# Altium PCB A1.PcbDoc (part 1 of 3)
Units mil, origin at the board's own origin, x right, y up, seen from the top; angles counter-clockwise.
Board outline 3937.01 x 3149.61 mil, 2 copper layers (Top Layer, Bottom Layer); 91 components, 93 nets, 317 pads, 42 vias.
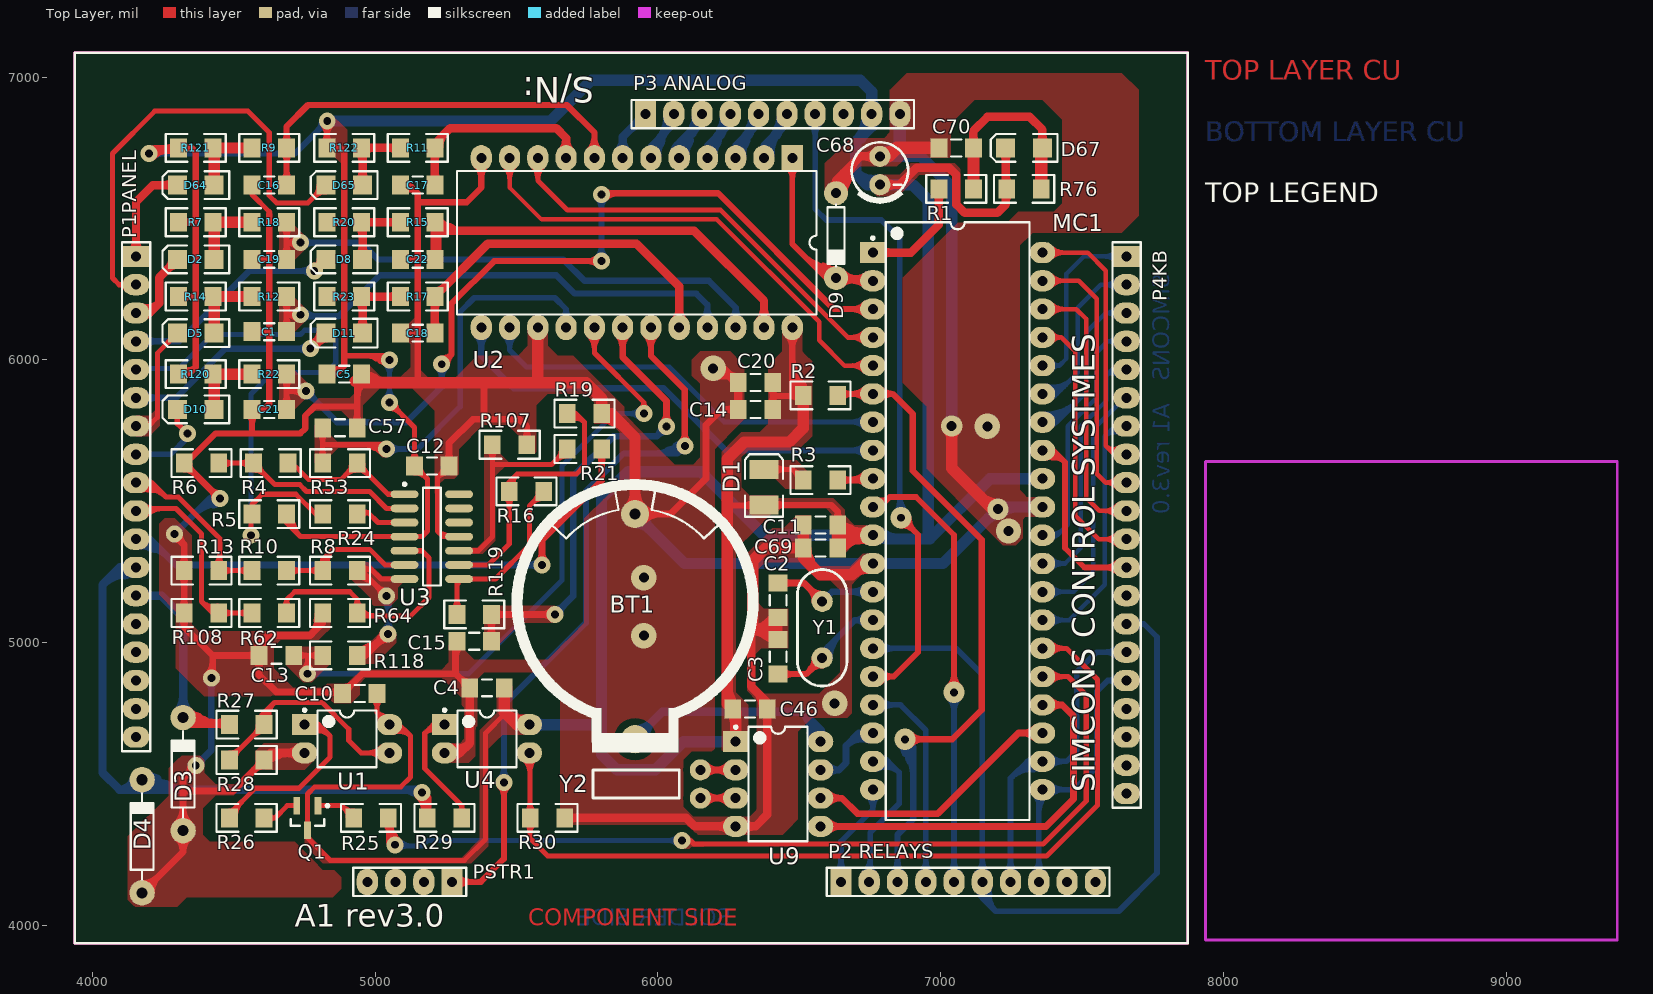
[diagram p0: Top Layer view]
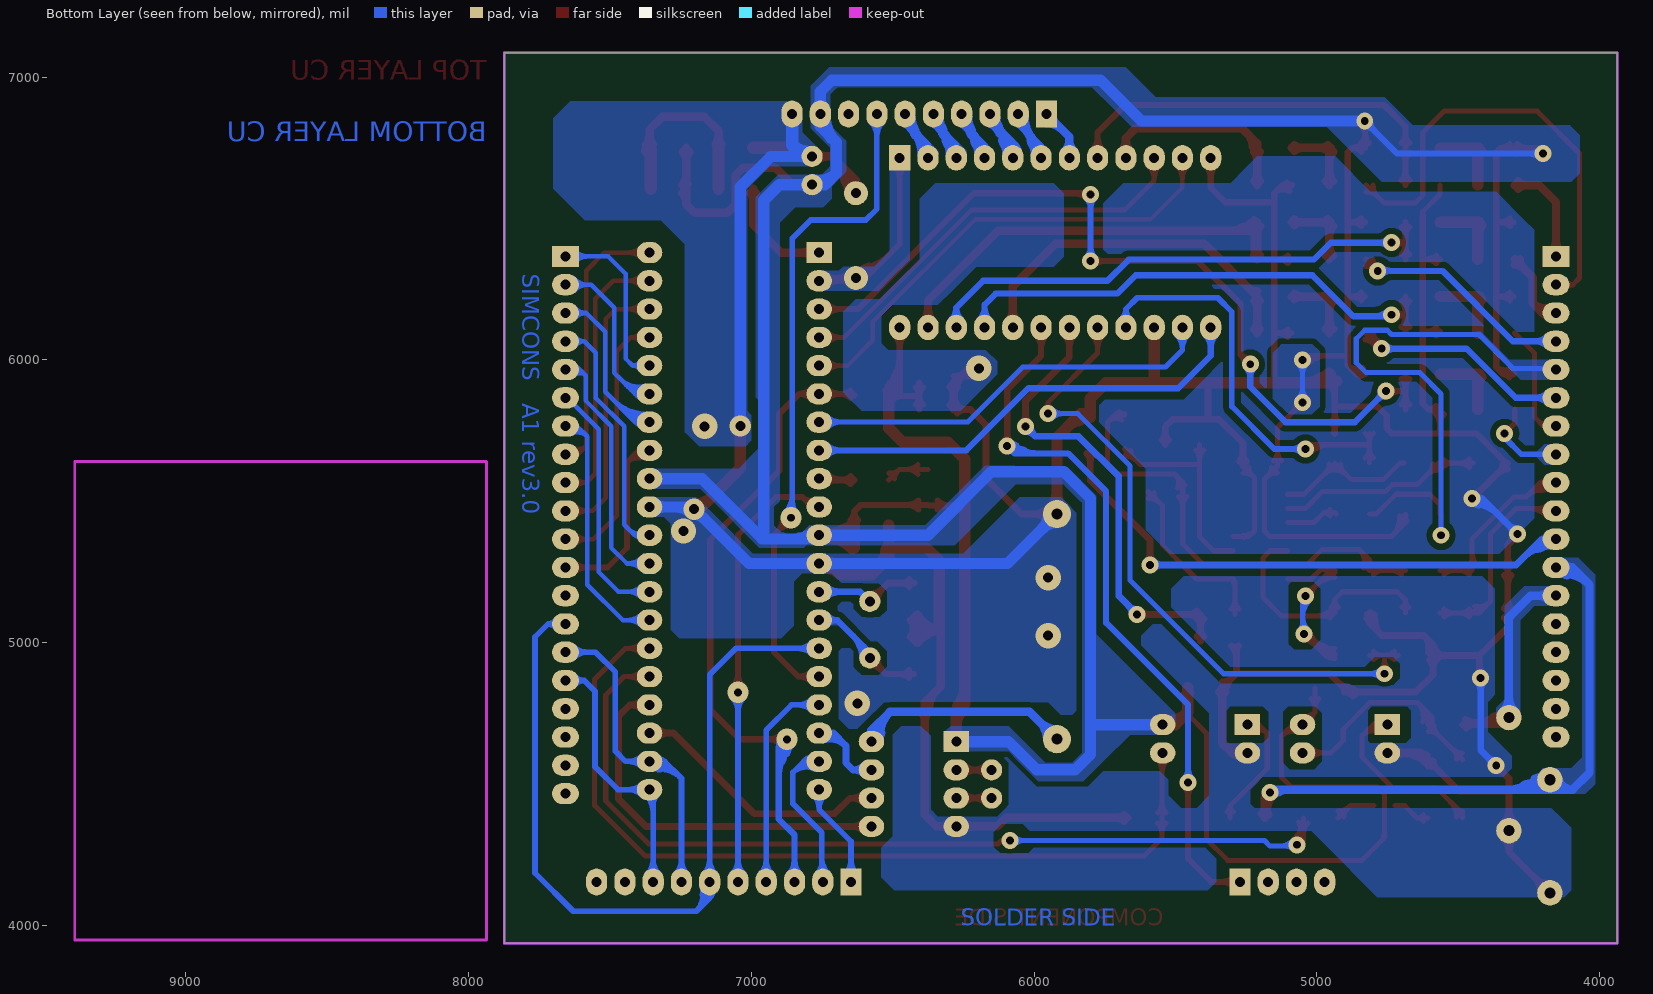
[diagram p1: Bottom Layer view, seen from below]
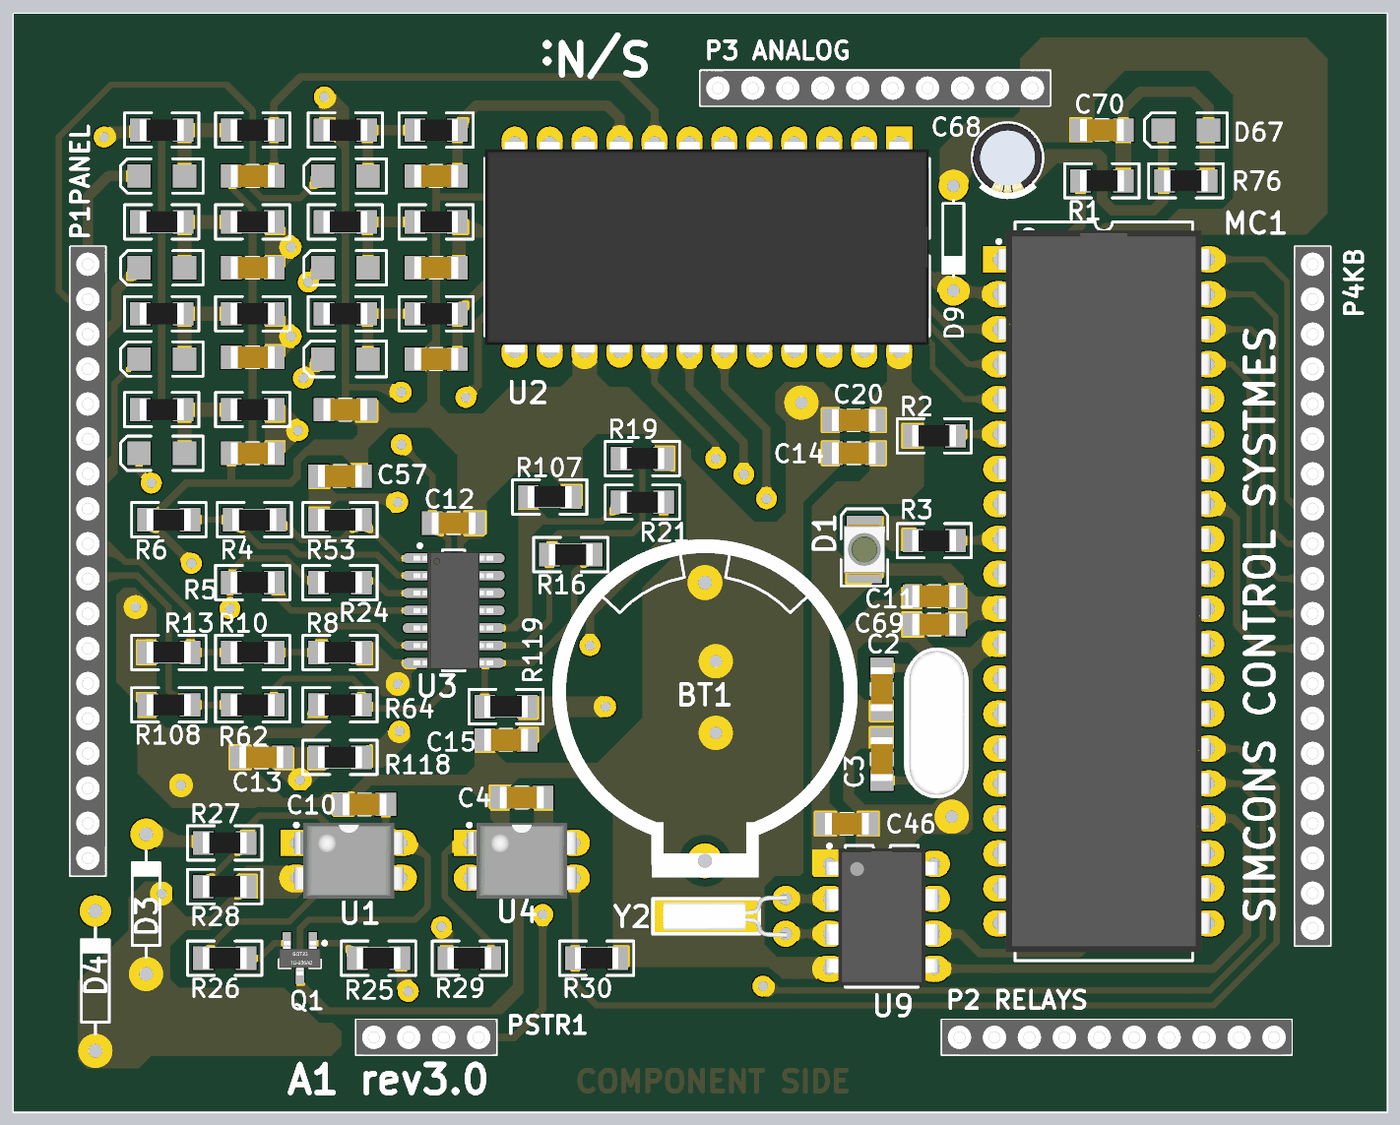
[diagram p4: 3D render of the assembled board from above, using the file's embedded part models]

## Layer stack, top to bottom
Top Layer: signal copper 1.4
Dielectric: dielectric 12.6, FR-4, Dk 4.8
Bottom Layer: signal copper 1.4

## Board outline
3937.01,3937.01 7874.02,3937.01 7874.02,7086.61 3937.01,7086.61

## Design rules (kind name [scope] priority, off if disabled: settings)
Clearance [All] p1: gap=16
Height [All] p1: minheight=0 maxheight=10000 prefheight=500
MinimumSolderMaskSliver [All] p1 off: minsoldermaskwidth=10
PlaneClearance [All] p1: clearance=22
PlaneConnect [All] p1: planeconnectstyle=Direct reliefexpansion=20 reliefentries=4 reliefconductorwidth=10 reliefairgap=10
PolygonConnect [All] p1: connectstyle=Direct reliefconductorwidth=10 reliefentries=4 polygonreliefangle="90 Angle"
RoutingVias [All] p1: holewidth=28 width=75 viastyle="Through Hole" minholewidth=28 minwidth=60 maxholewidth=28 maxwidth=100
SilkToSilkClearance [All] p1 off: silktosilkclearance=10
SilkscreenOverComponentPads [All] p1 off: minsilkscreentomaskgap=10
SolderMaskExpansion [All] p1: expansion=4
Width [All] p1: maxlimit=60 minlimit=16 preferedwidth=22
22 further rules are at their usual default settings.

## Components (designator, comment, footprint, x,y, rotation, side; value= is the part's Value field where it differs from the comment)
BT1 "Battery" CELL_HOLDER 5919,5142 r270 top
C1 "Cap Ceramic .1uF" C1206_W 4625,6100 r0 top
C2 "Cap Ceramic 22pF" C1206_W 6425,5150 r90 top
C3 "Cap Ceramic 22pF" C1206_W 6425,4950 r270 top
C4 "Cap Ceramic .1uF" C1206_W 5395,4840 r0 top
C5 "Cap Ceramic .1uF" C1206_W 4890,5950 r180 top
C10 "Cap Ceramic .1uF" C1206_W 4945,4820 r0 top
C11 "Cap Ceramic .1uF" C1206_W 6575,5416 r0 top
C12 "Cap Ceramic .1uF" C1206_W 5200,5625 r180 top
C13 "Cap2" C1206_W 4650,4955 r180 top
C14 "Cap Ceramic .1uF" C1206_W 6345,5825 r0 top
C15 "Cap2" C1206_W 5350,5005 r180 top
C16 "Cap Ceramic .1uF" C1206_W 4625,6618.61 r0 top
C17 "Cap Ceramic .1uF" C1206_W 5150,6618.61 r0 top
C18 "Cap Ceramic .1uF" C1206_W 5150,6095 r0 top
C19 "Cap Ceramic .1uF" C1206_W 4625,6355.82 r0 top
C20 "Cap" C1206_W 6345,5920 r0 top
C21 "Cap Ceramic .1uF" C1206_W 4625,5825 r0 top
C22 "Cap Ceramic .1uF" C1206_W 5150,6355.82 r0 top
C46 "Cap Ceramic .1uF" C1206_W 6325,4765 r180 top
C57 "Cap2" C1206_W 4875,5760 r0 top
C68 "Cap Ceramic .1uF" CAP_.1 6785,6670 r0 top
C69 "Cap Ceramic .1uF" C1206_W 6575,5335 r0 top
C70 "Cap2" C1206_W 7055,6750 r180 top
D1 "LED1" "LED SMD" 6375,5550 r90 top
D2 "Diode 1N4001" 4148SMDW 4365,6355.82 r0 top
D3 "P6KE6V8A" DIODE1A 4320,4535 r90 top
D4 "P6KE6V8A" DIODE1A 4175,4315 r90 top
D5 "Diode 1N4001" 4148SMDW 4365,6095 r0 top
D8 "Diode 1N4001" 4148SMDW 4890,6355.82 r0 top
D9 "Diode 1N4001" "DZENOR .25W" 6630,6440 r270 top
D10 "Diode 1N4001" 4148SMDW 4365,5825 r0 top
D11 "Diode 1N4001" 4148SMDW 4890,6095 r0 top
D64 "Diode 1N4001" 4148SMDW 4365,6618.61 r0 top
D65 "Diode 1N4001" 4148SMDW 4890,6618.61 r0 top
D67 "Diode 1N4001" 4148SMDW 7295,6750 r0 top
MC1 "PIC18F4620-I/P" PDIP600-P40 7060,5430 r0 top
P1PANEL "Header 18" HDR1X18_BURGE_F 4153.54,6366.14 r270 top locked
"P2 RELAYS" "Header 10" HDR1X10_BURGE_F 6647.24,4153.54 r0 top locked
"P3 ANALOG" "Header 10" HDR1X10_BURGE_F 5955.91,6870.08 r0 top locked
P4KB "Header 20" HDR1X20_BURGE_F 7657.48,6366.14 r270 top locked
PSTR1 "Header 4" HDR1X4_BURGE_F 5271.65,4153.54 r180 top locked
Q1 "BC847" SOT23_M 4760,4380 r270 top
R1 "Res 20K" R1206_W 7055,6605 r0 top
R2 "Res 1K" R1206_W 6575,5875 r180 top
R3 "Res 1K" R1206_W 6575,5575 r0 top
R4 "Res1" R1206_W 4630,5635 r180 top
R5 "Res 1K" R1206_W 4625,5455 r180 top
R6 "Res1" R1206_W 4385,5635 r180 top
R7 "Res 1K" R1206_W 4365,6487.21 r0 top
R8 "Res 1K" R1206_W 4875,5255 r0 top
R9 "Res 1K" R1206_W 4625,6750 r0 top
R10 "Res 1K" R1206_W 4625,5255 r0 top
R11 "Res 1K" R1206_W 5150,6750 r0 top
R12 "Res1" R1206_W 4625,6224.43 r0 top
R13 "Res 1K" R1206_W 4385,5255 r0 top
R14 "Res 1K" R1206_W 4365,6224.43 r0 top
R15 "Res1" R1206_W 5150,6487.21 r0 top
R16 "Res 1K" R1206_W 5535,5535 r0 top
R17 "Res 1K" R1206_W 5150,6224.43 r0 top
R18 "Res1" R1206_W 4625,6487.21 r0 top
R19 "Res 1K" R1206_W 5740,5810 r180 top
R20 "Res 1K" R1206_W 4890,6487.21 r0 top
R21 "Res 1K" R1206_W 5740,5685 r0 top
R22 "Res 1K" R1206_W 4625,5950 r0 top
R23 "Res 1K" R1206_W 4890,6224.43 r0 top
R24 "Res 1K" R1206_W 4875,5455 r0 top
R25 "2.2K" R1206_W 4985,4380 r180 top
R26 "220E" R1206_W 4545,4380 r180 top
R27 "MFR 1K .25W" R1206_W 4545,4710 r180 top
R28 "MFR 10K .25W" R1206_W 4545,4585 r180 top
R29 "MFR 1K .25W" R1206_W 5245,4380 r0 top
R30 "MFR 1K .25W" R1206_W 5608.98,4380 r0 top
R53 "Res1" R1206_W 4875,5635 r0 top
R62 "Res 1K" R1206_W 4625,5105 r0 top
R64 "Res 1K" R1206_W 4875,5105 r0 top
R76 "Res 20K" R1206_W 7295,6605 r0 top
R107 "Res 1K" R1206_W 5475,5700 r0 top
R108 "Res 1K" R1206_W 4385,5105 r0 top
R118 "Res Semi" R1206_W 4875,4955 r180 top
R119 "Res Semi" R1206_W 5350,5100 r0 top
R120 "Res Semi" R1206_W 4365,5950 r180 top
R121 "Res Semi" R1206_W 4365,6750 r180 top
R122 "Res Semi" R1206_W 4890,6750 r180 top
U1 "PC817" DIP-4 4900,4660 r0 top
U2 "HCF4067BM1" CDIP24 5925,6415 r180 top
U3 "LM324D" SOIC14_M 5200,5375 r0 top
U4 "PC817" DIP-4 5395,4660 r0 top
U9 "DS1302" DIP-8 6425,4500 r0 top
Y1 "XTAL" XTAL 6581,5046 r90 top
Y2 "XTAL" XTALWATCH 6150,4500 r90 top

## Footprints (in the part's own frame and the unit in brackets; to place one, negate y for a bottom-side part, rotate by r counter-clockwise, add the part's x,y. Pads: shape width x height; smd on the part's side, far side on the other; paste and mask are expansions set on the pad)
4148SMDW [mm] "Diode 250mA"
  rect 1.7x1.7 smd: 1(1.65,0) 2(-1.65,0)
  silkscreen extent -3,-1.25 3,1.25, body extent -1.78,-0.76 1.91,0.76, height 1.52
C1206_W [mm] "Chip Capacitor, Body 3.2x1.6mm, IPC High Density"
  rect 1.5x1.7 smd: 1(-1.55,0) 2(1.55,0)
  silkscreen extent -0.44,-0.76 0.44,0.76, body extent -1.6,-0.8 1.6,0.8, height 1
CAP_.1 [mm]
  round 1.905 hole 0.9: 1(0,1.27) 2(0,-1.27)
  silkscreen extent -2.54,-2.79 2.54,2.54, body extent -2.54,-2.54 2.54,2.54, height 12.7
CDIP24 [mil] "DIP; 24 Leads; Row Spacing 15.24 mm; Pitch 2.54 mm"
  rect 75x90 hole 35.43: 1(-550,-300)
  oval 75x90 hole 35.43: 2(-450,-300) 3(-350,-300) 4(-250,-300) 5(-150,-300) 6(-50,-300) 7(50,-300) 8(150,-300) 9(250,-300) 10(350,-300) 11(450,-300) 12(550,-300) 13(550,300) 14(450,300) 15(350,300) 16(250,300) 17(150,300) 18(50,300) 19(-50,300) 20(-150,300) 21(-250,300) 22(-350,300) 23(-450,300) 24(-550,300)
  silkscreen extent -636,-254 636,254, body extent -635,-304 635,304, height 200
CELL_HOLDER [mm] "Lithium Battery Holder for CR2032 3V Cell"
  round 2.54 hole 1: 1(12.275,0)
  round 2.54 hole 1 mask+0: 2(-7.95,0)
  silkscreen extent -10.6,-10.6 13.47,10.6, body extent -10.62,-10.59 13.17,10.63, height 10
DIODE1A [mil] "DIODE 1 AMPERE"
  round 90 hole 39.37: 1(-200,0) 2(200,0)
  silkscreen extent -152,-40 152,40, body extent -216,-39 216,39, height 82
DIP-4 [mil] "DIP; 4 Leads; Row Spacing 7.62 mm; Pitch 2.54 mm"
  rect 90x75 hole 35.43: 1(-150,50)
  oval 90x75 hole 35.43: 2(-150,-50) 3(150,-50) 4(150,50)
  silkscreen extent -155,-100 104,106, body extent -157,-110 157,108, height 170
DIP-8 [mil] "DIP; 8 Leads; Row Spacing 7.62 mm; Pitch 2.54 mm"
  rect 90x75 hole 35.43: 1(-150,150)
  oval 90x75 hole 35.43: 2(-150,50) 3(-150,-50) 4(-150,-150) 5(150,-150) 6(150,-50) 7(150,50) 8(150,150)
  silkscreen extent -155,-203 104,206, body extent -163,-199 163,194, height 201
"DZENOR .25W" [mil] "Axial Device, Thru-Hole; 2 Leads; 0.3 in Pin Spacing"
  round 85 hole 35.43: 1(-150,0) 2(150,0)
  silkscreen extent -109,-30 109,30, body extent -164,-35 163,35, height 74
HDR1X4_BURGE_F [mil] "Connector; Header; 4 Position"
  rect 75x95 hole 35.43: 1(0,0)
  oval 75x95 hole 35.43: 2(100,0) 3(200,0) 4(300,0)
  silkscreen extent -50,-50 350,50, body extent -50,-50 350,50, height 237
HDR1X10_BURGE_F [mil] "Connector; Header; 10 Position"
  rect 75x95 hole 35.43: 1(0,0)
  oval 75x95 hole 35.43: 2(100,0) 3(200,0) 4(300,0) 5(400,0) 6(500,0) 7(600,0) 8(700,0) 9(800,0) 10(900,0)
  silkscreen extent -50,-50 950,50, body extent -50,-50 950,50, height 237
HDR1X18_BURGE_F [mil] "Connector; Header; 18 Position"
  rect 75x95 hole 35.43: 1(0,0)
  oval 75x95 hole 35.43: 2(100,0) 3(200,0) 4(300,0) 5(400,0) 6(500,0) 7(600,0) 8(700,0) 9(800,0) 10(900,0) 11(1000,0) 12(1100,0) 13(1200,0) 14(1300,0) 15(1400,0) 16(1500,0) 17(1600,0) 18(1700,0)
  silkscreen extent -50,-50 1750,50, body extent -50,-50 1750,50, height 237
HDR1X20_BURGE_F [mil] "Connector; Header; 20 Position"
  rect 75x95 hole 35.43: 1(0,0)
  oval 75x95 hole 35.43: 2(100,0) 3(200,0) 4(300,0) 5(400,0) 6(500,0) 7(600,0) 8(700,0) 9(800,0) 10(900,0) 11(1000,0) 12(1100,0) 13(1200,0) 14(1300,0) 15(1400,0) 16(1500,0) 17(1600,0) 18(1700,0) 19(1800,0) 20(1900,0)
  silkscreen extent -50,-50 1950,50, body extent -50,-50 1950,50, height 237
"LED SMD" [mm] "SM LED; 2 C-Bend Leads; Body 3.5 x 2.8 x 1.9 mm, inc leads (LxWxH typ)"
  rect 1.7x2.6 smd: 1(-1.6,0) 2(1.6,0)
  silkscreen extent -2.65,-1.7 2.95,1.7, body extent -1.85,-1.5 1.85,1.5, height 2.1
PDIP600-P40 [mil] "DIP, 40-Leads, Row Spacing 15.24mm, Pitch 2.54mm, Body 51.8x13.5mm"
  rect 90x75 hole 35.43: 1(-300,950)
  oval 90x75 hole 35.43: 2(-300,850) 3(-300,750) 4(-300,650) 5(-300,550) 6(-300,450) 7(-300,350) 8(-300,250) 9(-300,150) 10(-300,50) 11(-300,-50) 12(-300,-150) 13(-300,-250) 14(-300,-350) 15(-300,-450) 16(-300,-550) 17(-300,-650) 18(-300,-750) 19(-300,-850) 20(-300,-950) 21(300,-950) 22(300,-850) 23(300,-750) 24(300,-650) 25(300,-550) 26(300,-450) 27(300,-350) 28(300,-250) 29(300,-150) 30(300,-50) 31(300,50) 32(300,150) 33(300,250) 34(300,350) 35(300,450) 36(300,550) 37(300,650) 38(300,750) 39(300,850) 40(300,950)
  silkscreen extent -305,-1057 254,1057, body extent -305,-1032 305,1032, height 224
R1206_W [mm] "Chip Capacitor, Body 3.2x1.6mm, IPC High Density"
  rect 1.5x1.7 smd: 1(-1.55,0) 2(1.55,0)
  silkscreen extent -2.7,-1.25 2.7,1.25, body extent -1.59,-0.77 1.59,0.77, height 0.63
SOIC14_M [mm] "SOIC, 14-Leads, Body 8.7x3.9mm, Pitch 1.27mm, IPC Low Density"
  oval 2.5x0.7 smd: 1(-2.45,3.81) 2(-2.45,2.54) 3(-2.45,1.27) 4(-2.45,0) 5(-2.45,-1.27) 6(-2.45,-2.54) 7(-2.45,-3.81) 8(2.45,-3.81) 9(2.45,-2.54) 10(2.45,-1.27) 11(2.45,0) 12(2.45,1.27) 13(2.45,2.54) 14(2.45,3.81)
  silkscreen extent -2.57,-4.4 0.8,4.83, body extent -2.92,-4.28 2.88,4.27, height 1.75
SOT23_M [mm] "SOT23, 3-Leads, Body 2.9x1.3mm, Pitch 0.95mm, Lead Span 2.3mm, IPC Low Density"
  rect 1.6x0.6 smd: 1(-1.1,0.95) 2(-1.1,-0.95) 3(1.1,0)
  silkscreen extent -1.22,-1.5 0.7,1.93, body extent -1.25,-1.5 1.25,1.5, height 1.09
XTAL [mm] "Multi Layer Capacitor"
  round 1.905 hole 0.9: 1(-2.54,0) 2(2.54,0)
  silkscreen extent -5.08,-2.22 5.39,2.22, body extent -5.3,-2.29 5.68,2.21, height 3.6
XTALWATCH [mm]
  round 1.905 hole 0.9: 1(1.27,0) 2(-1.27,0)
  silkscreen extent -1.27,1.91 1.27,9.65, body extent -1.53,-0.08 1.53,8.9, height 2

## Part data
BT1: "Multicell Battery"
C1 C2 C3 C4 C5 C10 C11 C12 C14 C16 C17 C18 C19 C21 C22 C46 C68 C69: library part Cap, "Capacitor"
C13 C15 C20 C57 C70: "Capacitor"
D1: "Typical RED GaAs LED"
D2 D5 D8 D9 D10 D11 D64 D65 D67: "1 Amp General Purpose Rectifier"
D3 D4: library part Tranzorb, "Transient Voltage Suppression (TVS) Diode"
MC1: library part PIC16F877A-I/P, "Enhanced FLASH Microcontroller, 8K (x14-Bit words) FLASH, 368 Bytes RAM, 40-Pin PDIP, Standard VDD Range, Industrial Temperature"
P1PANEL: "Header, 18-Pin"
"P2 RELAYS" "P3 ANALOG": "Header, 10-Pin"
P4KB: "Header, 20-Pin"
PSTR1: "Header, 4-Pin"
Q1: "NPN General-purpose Transistor"
R1 R2 R3 R5 R7 R8 R9 R10 R11 R13 R14 R16 R17 R19 R20 R21 R22 R23 R24 R25 R26 R27 R28 R29 R30 R62 R64 R76 R107 R108: library part Res1, "Resistor"
R4 R6 R12 R15 R18 R53: "Resistor"
R118 R119 R120 R121 R122: "Semiconductor Resistor"
U1 U4: library part Optoisolator1, "4-Pin Phototransistor Optocoupler"
U2: "Analog Multiplexer/Demultiplexer"
U3: "Quadruple Operational Amplifier"
U9: "Trickle Charge Timekeeping Chip"
Y1 Y2: "Crystal Oscillator"

## Via types
v1: diameter 60, hole 28, Top Layer to Bottom Layer, 31 vias
v2: diameter 90, hole 35.43, Top Layer to Bottom Layer, 6 vias
v3: diameter 75, hole 28, Top Layer to Bottom Layer, 3 vias
v4: diameter 75, hole 35.43, Top Layer to Bottom Layer, 2 vias

## Nets (pads, with @x,y where several pads share a name; then routed paths per layer and width w, separated by ;. In a path a pad name is that pad's centre, name@x,y a point inside that pad or via, vN(x,y) a via of type N, cw(c..) or ccw(c..) an arc to the next point about the centre after c; other vN are vias at no path point)
ANALOGIN: D9.2 MC1.2 U2.1 | length 2515.8
  Top Layer w20: U2.1@6475,6750 U2.1@6475,6715 6475,6410 6607.5,6277.5 6617.5,6277.5 6630,6265 6645,6280 MC1.2@6760,6280 ; 6540.49,6346.48 cw(c6507.93,6224.94) D9.2@6618.97,6284.12 ; 6584.98,6334.56 cw(c6563.55,6254.59) D9.2@6636.62,6293.53 ; 6585.49,6314.43 ccw(c6595.13,6350.4) D9.2@6613.75,6318.15 ; 6588.66,6313.58 cw(c6577.55,6272.13) D9.2@6618.17,6285.97 ; 6475,6641.11 ccw(c6408.61,6641.11) 6455.55,6688.05 cw(c6408.61,6641.11) 6475,6641.11 ; 6475,6641.11 cw(c6541.39,6641.11) 6494.45,6688.05 ccw(c6541.39,6641.11) 6475,6641.11 ; 6684.32,6280 ccw(c6684.32,6235.68) 6652.98,6267.02 cw(c6684.32,6235.68) 6684.32,6280 ; 6684.32,6280 cw(c6684.32,6344.32) 6638.84,6298.84 ccw(c6684.32,6344.32) 6684.32,6280 ; 6684.92,6292.78 ccw(c6700.67,6351.56) MC1.2@6736.37,6302.27 ; 6684.92,6292.78 ccw(c6700.67,6351.56) MC1.2@6736.37,6302.27 ; 6684.92,6292.78 ccw(c6700.67,6351.56) MC1.2@6736.37,6302.27 ; 6686.11,6280 ccw(c6686.11,6346.39) 6733.05,6299.45 cw(c6686.11,6346.39) 6686.11,6280 ; 6686.11,6280 cw(c6686.11,6213.61) 6733.05,6260.55 ccw(c6686.11,6213.61) 6686.11,6280 ; 6699.05,6288.99 cw(c6686.41,6241.85) MC1.2@6728.68,6266.25 ; 6699.05,6288.99 cw(c6686.41,6241.85) MC1.2@6728.68,6266.25 ; 6699.05,6288.99 cw(c6686.41,6241.85) MC1.2@6728.68,6266.25 ; 6514.77,6370.23 ccw(c6630,6485.46) 6630,6322.5 cw(c6630,6485.46) 6514.77,6370.23 ; 6548.91,6336.09 ccw(c6630,6417.18) 6630,6302.5 cw(c6630,6417.18) 6548.91,6336.09 ; 6583.05,6301.95 ccw(c6630,6348.89) 6630,6282.5 cw(c6630,6348.89) 6583.05,6301.95 ; D9.2@6652.98,6312.98 ccw(c6732.6,6392.6) 6732.6,6280 cw(c6732.6,6392.6) D9.2@6652.98,6312.98
AUTO: MC1.40 P4KB.8 | length 1277.6
  Top Layer w16: MC1.40@7360,6380 7520,6380 7584,6316 7584,5696 ; 7598.02,5681.98 ccw(c7621.88,5705.84) P4KB.8@7640.16,5677.49 ; P4KB.8@7631.49,5690.93 cw(c7610.88,5722.88) 7584,5696 ; P4KB.8@7657.48,5666.14 7613.86,5666.14 7584,5696 ; 7438.72,6380 ccw(c7438.72,6308.78) 7388.36,6359.14 cw(c7438.72,6308.78) 7438.72,6380 ; 7438.72,6380 cw(c7438.72,6451.22) 7388.36,6400.86 ccw(c7438.72,6451.22) 7438.72,6380
BAT: PSTR1.1 U2.19 | length 3845.8
  Top Layer w22: PSTR1.1@5271.65,4153.54 5373.54,4153.54 5455,4235 v1(5455,4505) ; U2.19@5975,6115 5975,6015 6095,5895 v1(6095,5695) ; 5335.63,4153.54 ccw(c5335.63,4089.57) 5290.39,4134.81 cw(c5335.63,4089.57) 5335.63,4153.54 ; 5335.63,4153.54 cw(c5335.63,4217.52) 5290.39,4172.28 ccw(c5335.63,4217.52) 5335.63,4153.54 ; 5455,4459.13 ccw(c5409.13,4459.13) 5441.56,4491.56 cw(c5409.13,4459.13) 5455,4459.13 ; 5455,4459.13 cw(c5500.87,4459.13) 5468.44,4491.56 ccw(c5500.87,4459.13) 5455,4459.13 ; 5975,6043.52 ccw(c5911.02,6043.52) 5956.26,6088.76 cw(c5911.02,6043.52) 5975,6043.52 ; 5975,6043.52 cw(c6038.98,6043.52) 5993.74,6088.76 ccw(c6038.98,6043.52) 5975,6043.52 ; 6095,5740.87 ccw(c6140.87,5740.87) 6108.44,5708.44 cw(c6140.87,5740.87) 6095,5740.87 ; 6095,5740.87 cw(c6049.13,5740.87) 6081.56,5708.44 ccw(c6049.13,5740.87) 6095,5740.87
  Bottom Layer w22: v1(5455,4505) 5455,4780 5745,5070 5745,5535 5879.29,5669.29 6069.29,5669.29 v1(6095,5695) ; 6030.83,5679.14 cw(c6057.66,5632.68) v1@6085.23,5678.7 ; 6059.57,5671.2 ccw(c6042.9,5700.08) v1@6076.09,5696.84 ; 6062.78,5673.05 cw(c6080.77,5641.9) v1@6090.08,5676.65 ; 6063.22,5697.84 cw(c6079.65,5669.39) v1@6096.54,5697.57 ; 5455,4550.87 ccw(c5500.87,4550.87) 5468.44,4518.44 cw(c5500.87,4550.87) 5455,4550.87 ; 5455,4550.87 cw(c5409.13,4550.87) 5441.56,4518.44 ccw(c5409.13,4550.87) 5455,4550.87 ; 5987.06,5669.29 ccw(c5987.06,5802.94) 6081.56,5708.44 cw(c5987.06,5802.94) 5987.06,5669.29 ; 6040.18,5669.29 ccw(c6040.18,5749.82) 6097.12,5692.88 cw(c6040.18,5749.82) 6040.18,5669.29
BTS+_R: P1PANEL.10 R62.1 R108.2 | length 1526.8
  Top Layer w18: P1PANEL.10@4153.54,5466.14 4162.4,5475 4295,5475 4385,5385 4385,5145 ; R62.1@4563.98,5105 R108.2@4446.02,5105 4425,5105 4385,5145 ; 4385,5145 ccw(c4427.63,5187.62) 4441.35,5128.93 cw(c4427.63,5187.62) 4385,5145 ; 4495.58,5105 ccw(c4495.58,5055.44) 4460.54,5090.48 cw(c4495.58,5055.44) 4495.58,5105 ; 4495.58,5105 cw(c4495.58,5154.56) 4460.54,5119.52 ccw(c4495.58,5154.56) 4495.58,5105 ; 4514.42,5105 ccw(c4514.42,5154.56) 4549.46,5119.52 cw(c4514.42,5154.56) 4514.42,5105 ; 4514.42,5105 cw(c4514.42,5055.44) 4549.46,5090.48 ccw(c4514.42,5055.44) 4514.42,5105 ; P1PANEL.10@4170.97,5458.72 cw(c4210.28,5419.41) 4210.28,5475 ccw(c4210.28,5419.41) P1PANEL.10@4170.97,5458.72 ; P1PANEL.10@4183.7,5445.99 cw(c4253.73,5375.95) 4253.73,5475 ccw(c4253.73,5375.95) P1PANEL.10@4183.7,5445.99 ; P1PANEL.10@4183.7,5486.29 ccw(c4210.96,5513.56) 4210.96,5475 cw(c4210.96,5513.56) P1PANEL.10@4183.7,5486.29 ; 4407.89,5122.11 ccw(c4436.3,5150.52) 4445.45,5111.4 cw(c4436.3,5150.52) 4407.89,5122.11
BTS-_R: P1PANEL.9 R10.1 R13.2 | length 1852.5
  Top Layer w18: P1PANEL.9@4153.54,5566.14 4208.86,5566.14 ; P1PANEL.9@4158.26,5560.82 ccw(c4211.7,5614.7) 4212.01,5538.81 ; P1PANEL.9@4170.94,5573.6 ccw(c4213.17,5616.18) 4213.42,5556.21 ; P1PANEL.9@4183.78,5546.07 cw(c4208.05,5522.01) 4207.91,5556.18 ; 4400,5418.08 4419,5399.08 ; 4450,5310 4450,5365 ; R10.1@4563.98,5255 4450,5255 4450,5365 ; 4208.86,5566.14 ccw(c4208.86,5544.37) 4189.23,5553.8 cw(c4208.86,5544.37) 4208.86,5566.14 ; 4208.86,5566.14 cw(c4208.86,5587.91) 4189.23,5578.48 ccw(c4208.86,5587.91) 4208.86,5566.14 ; 4208.86,5566.14 4260,5515 ; 4260,5515 ccw(c4195.14,5450.15) 4171.03,5538.64 cw(c4195.14,5450.15) 4260,5515 ; 4260,5515 4303.08,5515 4419,5399.08 ; 4419,5399.08 4450,5368.08 4450,5365 ; 4495.58,5255 ccw(c4495.58,5205.44) 4460.54,5240.48 cw(c4495.58,5205.44) 4495.58,5255 ; 4495.58,5255 cw(c4495.58,5304.56) 4460.54,5269.52 ccw(c4495.58,5304.56) 4495.58,5255 ; 4514.42,5255 ccw(c4514.42,5304.56) 4549.46,5269.52 cw(c4514.42,5304.56) 4514.42,5255 ; 4514.42,5255 cw(c4514.42,5205.44) 4549.46,5240.48 ccw(c4514.42,5205.44) 4514.42,5255 ; P1PANEL.9@4161.57,5573.38 cw(c4176.35,5519.12) 4216.12,5558.88 ccw(c4176.35,5519.12) P1PANEL.9@4161.57,5573.38 ; P1PANEL.9@4166.3,5556.01 cw(c4185.75,5484.63) 4238.06,5536.94 ccw(c4185.75,5484.63) P1PANEL.9@4166.3,5556.01 ; R13.2@4431.51,5273.45 ccw(c4386.87,5318.09) 4450,5318.09 cw(c4386.87,5318.09) R13.2@4431.51,5273.45 ; 4450,5298.9 ccw(c4485.98,5298.9) 4460.54,5273.45 cw(c4485.98,5298.9) 4450,5298.9
BTSBATT: C13.1 R118.2 U2.17 | length 3465.8
  Top Layer w18: C13.1@4711.02,4955 R118.2@4813.98,4955 ; v1(4760,4890) 4760,4955 ; U2.17@5775,6115 5775,6025 5950,5850 ; v1(5950,5810) 5950,5850 ; 4760,4940.7 ccw(c4810.7,4940.7) 4774.85,4904.85 cw(c4810.7,4940.7) 4760,4940.7 ; 4760,4940.7 cw(c4709.3,4940.7) 4745.15,4904.85 ccw(c4709.3,4940.7) 4760,4940.7 ; 4760.58,4955 ccw(c4760.58,4905.44) 4725.54,4940.48 cw(c4760.58,4905.44) 4760.58,4955 ; 4760.58,4955 cw(c4760.58,5004.56) 4725.54,4969.52 ccw(c4760.58,5004.56) 4760.58,4955 ; 4764.42,4955 ccw(c4764.42,5004.56) 4799.46,4969.52 cw(c4764.42,5004.56) 4764.42,4955 ; 4764.42,4955 cw(c4764.42,4905.44) 4799.46,4940.48 ccw(c4764.42,4905.44) 4764.42,4955 ; 5775,6038.69 ccw(c5706.19,6038.69) 5754.85,6087.35 cw(c5706.19,6038.69) 5775,6038.69 ; 5775,6038.69 cw(c5843.81,6038.69) 5795.15,6087.35 ccw(c5843.81,6038.69) 5775,6038.69 ; 5950,5850 ccw(c5977.59,5850) 5961.92,5827.29 cw(c5977.59,5850) 5950,5850 ; 5950,5850 cw(c5922.41,5850) 5938.08,5827.29 ccw(c5922.41,5850) 5950,5850
  Bottom Layer w18: v1(4760,4890) 5330,4890 5660,5220 5660,5625 5845,5810 v1(5950,5810) ; 4810.7,4890 ccw(c4810.7,4839.3) 4774.85,4875.15 cw(c4810.7,4839.3) 4810.7,4890 ; 4810.7,4890 cw(c4810.7,4940.7) 4774.85,4904.85 ccw(c4810.7,4940.7) 4810.7,4890 ; 5899.3,5810 ccw(c5899.3,5860.7) 5935.15,5824.85 cw(c5899.3,5860.7) 5899.3,5810 ; 5899.3,5810 cw(c5899.3,5759.3) 5935.15,5795.15 ccw(c5899.3,5759.3) 5899.3,5810
BUZZER: "P2 RELAYS.1" MC1.20 | length 790.3
  Bottom Layer w20: 6647.24,4153.54 6647.24,4297.24 6760,4410 MC1.20@6760,4480 ; 6647.24,4229.93 ccw(c6713.63,4229.93) 6666.69,4182.99 cw(c6713.63,4229.93) 6647.24,4229.93 ; 6647.24,4229.93 cw(c6580.85,4229.93) 6627.8,4182.99 ccw(c6580.85,4229.93) 6647.24,4229.93 ; 6760,4413.61 ccw(c6693.61,4413.61) 6740.55,4460.55 cw(c6693.61,4413.61) 6760,4413.61 ; 6760,4413.61 cw(c6826.39,4413.61) 6779.45,4460.55 ccw(c6826.39,4413.61) 6760,4413.61
CONT_S_IN: D10.2 P1PANEL.8 | length 320.3
  Top Layer w20: D10.2@4300.04,5825 4300.04,5774.96 v1(4335,5740)
  Bottom Layer w20: P1PANEL.8@4153.54,5666.14 4276.14,5666.14 4335,5725 v1(4335,5740)
CONT_SENSE: C21.2 MC1.3 R22.2 | length 4748
  Top Layer w22: C21.2@4686.02,5825 4686.02,5887.5 ; R22.2@4686.02,5950 4686.02,5887.5 ; v1(4755,5890) 4688.52,5890 4686.02,5887.5 ; v1@5232.06,5985.6 cw(c5262.21,5979.43) 5254.25,6009.16 ; v1(5235,5985) 5270,6020 5270,6200 5420,6350 5790,6350 v1@5800,6360 ; v1@5235.6,5982.06 ccw(c5229.43,6012.21) 5259.16,6004.25 ; v1(5800,6585) 5805,6590 6212.58,6590 6622.58,6180 MC1.3@6760,6180 ; 4686.02,5873.67 ccw(c4730.75,5873.67) 4699.12,5842.04 cw(c4730.75,5873.67) 4686.02,5873.67 ; 4686.02,5873.67 cw(c4641.29,5873.67) 4672.92,5842.04 ccw(c4641.29,5873.67) 4686.02,5873.67 ; 4686.02,5901.33 ccw(c4641.29,5901.33) 4672.92,5932.96 cw(c4641.29,5901.33) 4686.02,5901.33 ; 4686.02,5901.33 cw(c4730.75,5901.33) 4699.12,5932.96 ccw(c4730.75,5901.33) 4686.02,5901.33 ; 4709.13,5890 ccw(c4709.13,5935.87) 4741.56,5903.44 cw(c4709.13,5935.87) 4709.13,5890 ; 4709.13,5890 cw(c4709.13,5844.13) 4741.56,5876.56 ccw(c4709.13,5844.13) 4709.13,5890 ; 5267.44,6017.44 ccw(c5299.87,5985) 5254,5985 cw(c5299.87,5985) 5267.44,6017.44 ; 5267.44,6017.44 cw(c5235,6049.87) 5235,6004 ccw(c5235,6049.87) 5267.44,6017.44 ; 5754.13,6350 ccw(c5754.13,6395.87) 5786.56,6363.44 cw(c5754.13,6395.87) 5754.13,6350 ; 5754.13,6350 cw(c5754.13,6304.13) 5786.56,6336.56 ccw(c5754.13,6304.13) 5754.13,6350 ; 6688.52,6180 ccw(c6688.52,6243.98) 6733.76,6198.74 cw(c6688.52,6243.98) 6688.52,6180 ; 6688.52,6180 cw(c6688.52,6116.02) 6733.76,6161.26 ccw(c6688.52,6116.02) 6688.52,6180 ; v1@5813.44,6571.56 cw(c5857.94,6527.06) 5857.94,6590 ccw(c5857.94,6527.06) v1@5813.44,6571.56 ; v1@5813.44,6598.44 ccw(c5833.8,6618.8) 5833.8,6590 cw(c5833.8,6618.8) v1@5813.44,6598.44
  Bottom Layer w22: v1(4755,5890) 4865,5780 5110,5780 5235,5905 v1(5235,5985) ; v1(5800,6350) v1(5800,6585) ; 4787.44,5857.56 ccw(c4755,5825.13) 4755,5871 cw(c4755,5825.13) 4787.44,5857.56 ; 4787.44,5857.56 cw(c4819.87,5890) 4774,5890 ccw(c4819.87,5890) 4787.44,5857.56 ; 5235,5939.13 ccw(c5189.13,5939.13) 5221.56,5971.56 cw(c5189.13,5939.13) 5235,5939.13 ; 5235,5939.13 cw(c5280.87,5939.13) 5248.44,5971.56 ccw(c5280.87,5939.13) 5235,5939.13 ; 5800,6395.87 ccw(c5845.87,6395.87) 5813.44,6363.44 cw(c5845.87,6395.87) 5800,6395.87 ; 5800,6395.87 cw(c5754.13,6395.87) 5786.56,6363.44 ccw(c5754.13,6395.87) 5800,6395.87 ; 5800,6539.13 ccw(c5754.13,6539.13) 5786.56,6571.56 cw(c5754.13,6539.13) 5800,6539.13 ; 5800,6539.13 cw(c5845.87,6539.13) 5813.44,6571.56 ccw(c5845.87,6539.13) 5800,6539.13
CRANK: "P2 RELAYS.4" MC1.17 | length 1178.6
  Bottom Layer w20: MC1.17@6760,4780 6858,4780 6947.24,4690.76 6947.24,4153.54 ; 6833.89,4780 ccw(c6833.89,4713.61) 6786.95,4760.55 cw(c6833.89,4713.61) 6833.89,4780 ; 6833.89,4780 cw(c6833.89,4846.39) 6786.95,4799.45 ccw(c6833.89,4846.39) 6833.89,4780 ; 6947.24,4229.93 ccw(c7013.63,4229.93) 6966.69,4182.99 cw(c7013.63,4229.93) 6947.24,4229.93 ; 6947.24,4229.93 cw(c6880.85,4229.93) 6927.8,4182.99 ccw(c6880.85,4229.93) 6947.24,4229.93
DG-B_: "P3 ANALOG.3" U2.5 | length 1477.2
  Bottom Layer w24: U2.5@6062.48,6744.71 ccw(c6030.91,6800.71) 6093,6784.07 ; U2.5@6074.25,6723.8 ccw(c6030.39,6799.76) 6115.12,6777.06 ; U2.5@6075,6715 6075,6770 ; 6091.43,6778.21 ccw(c6146.11,6763.56) U2.5@6097.08,6735.25 ; 6119.62,6819.84 cw(c6173.84,6805.31) 6156.37,6858.65 ; 6155.91,6870.08 6155.91,6850.91 6075,6770 ; 6075,6770 ccw(c6106.49,6770) 6089.09,6743.75 cw(c6106.49,6770) 6075,6770 ; 6075,6770 cw(c6043.51,6770) 6060.91,6743.75 ccw(c6043.51,6770) 6075,6770 ; U2.5@6052.5,6722.5 cw(c6112.86,6722.5) 6070.18,6765.18 ccw(c6112.86,6722.5) U2.5@6052.5,6722.5 ; U2.5@6076.5,6722.5 cw(c6194.8,6722.5) 6111.15,6806.15 ccw(c6194.8,6722.5) U2.5@6076.5,6722.5 ; U2.5@6100.5,6722.5 cw(c6276.74,6722.5) 6152.12,6847.12 ccw(c6276.74,6722.5) U2.5@6100.5,6722.5 ; 6105.89,6800.89 ccw(c6046.7,6860.08) 6130.41,6860.08 cw(c6046.7,6860.08) 6105.89,6800.89 ; 6124.03,6798.47 ccw(c6061.26,6834.72) 6131.27,6853.48 cw(c6061.26,6834.72) 6124.03,6798.47 ; 6128.03,6823.03 cw(c6155.91,6795.16) 6155.91,6834.58 ccw(c6155.91,6795.16) 6128.03,6823.03 ; 6131.76,6811.85 cw(c6175.61,6786.53) 6162.51,6835.45 ccw(c6175.61,6786.53) 6131.76,6811.85
DG-R_: "P3 ANALOG.1" U2.7 | length 529.9
  Bottom Layer w30: U2.7@5875,6715 5875,6789.17 5955.91,6870.08 ; 5875,6776.82 ccw(c5929.32,6776.82) 5890.91,6738.41 cw(c5929.32,6776.82) 5875,6776.82 ; 5875,6776.82 cw(c5820.68,6776.82) 5859.09,6738.41 ccw(c5820.68,6776.82) 5875,6776.82 ; 5900.43,6814.6 cw(c5955.91,6759.12) 5955.91,6837.58 ccw(c5955.91,6759.12) 5900.43,6814.6 ; 5924.57,6838.74 ccw(c5903.23,6860.08) 5933.41,6860.08 cw(c5903.23,6860.08) 5924.57,6838.74
DG-Y_: "P3 ANALOG.2" U2.6 | length 948.8
  Bottom Layer w24: U2.6@5969,6747.29 ccw(c5962.85,6772.74) 5988.15,6765.96 ccw(c6016.49,6758.37) U2.6@5994.29,6739.18 ; U2.6@5974.25,6723.8 ccw(c5930.39,6799.76) 6015.12,6777.06 ; U2.6@5975,6715 5975,6755 6055.91,6835.91 6055.91,6870.08 ; U2.6@5976.5,6722.5 cw(c6058.58,6722.5) 6000.54,6780.54 ccw(c6058.58,6722.5) U2.6@5976.5,6722.5 ; 5995.28,6775.28 ccw(c5910.49,6860.08) 6030.41,6860.08 cw(c5910.49,6860.08) 5995.28,6775.28 ; U2.6@6000.5,6722.5 cw(c6140.52,6722.5) 6041.51,6821.51 ccw(c6140.52,6722.5) U2.6@6000.5,6722.5 ; 6036.25,6816.25 ccw(c5992.43,6860.08) 6054.41,6860.08 cw(c5992.43,6860.08) 6036.25,6816.25
DGSTOP: "P2 RELAYS.5" MC1.10 | length 2384.7
  Top Layer w20: MC1.10@6758.15,5488.29 cw(c6792.99,5457.39) 6797.54,5503.74 ; MC1.10@6760,5480 6785,5480 6820,5515 ; v3(7047.24,4824.24) 7047.24,5380.76 6913,5515 6820,5515 ; 6820,5515 cw(c6791.41,5543.59) 6777.18,5505.74 ccw(c6791.41,5543.59) 6820,5515 ; 7047.24,4890.63 ccw(c7113.63,4890.63) 7066.69,4843.69 cw(c7113.63,4890.63) 7047.24,4890.63 ; 7047.24,4890.63 cw(c6980.85,4890.63) 7027.8,4843.69 ccw(c6980.85,4890.63) 7047.24,4890.63 ; MC1.10@6795,5480 cw(c6819.14,5480) 6802.07,5497.07 ccw(c6819.14,5480) MC1.10@6795,5480
  Bottom Layer w20: 7047.24,4153.54 v3(7047.24,4824.24) ; 7047.24,4229.93 ccw(c7113.63,4229.93) 7066.69,4182.99 cw(c7113.63,4229.93) 7047.24,4229.93 ; 7047.24,4229.93 cw(c6980.85,4229.93) 7027.8,4182.99 ccw(c6980.85,4229.93) 7047.24,4229.93 ; 7047.24,4757.85 ccw(c6980.85,4757.85) 7027.8,4804.8 cw(c6980.85,4757.85) 7047.24,4757.85 ; 7047.24,4757.85 cw(c7113.63,4757.85) 7066.69,4804.8 ccw(c7113.63,4757.85) 7047.24,4757.85
DOWN: MC1.38 P4KB.10 | length 1299.6
  Top Layer w16: MC1.38@7360,6180 7480,6180 7515,6145 7515,5512 7560.86,5466.14 P4KB.10@7657.48,5466.14 ; P4KB.10@7626.62,5445.28 ccw(c7576.26,5394.92) 7576.26,5466.14 ccw(c7576.26,5537.36) P4KB.10@7626.62,5487 ; 7438.72,6180 ccw(c7438.72,6108.78) 7388.36,6159.14 cw(c7438.72,6108.78) 7438.72,6180 ; 7438.72,6180 cw(c7438.72,6251.22) 7388.36,6200.86 ccw(c7438.72,6251.22) 7438.72,6180
EB-B_: "P3 ANALOG.6" U2.2 | length 1183.9
  Bottom Layer w24: U2.2@6366.33,6746.48 ccw(c6353.6,6781.69) 6389.76,6772 ccw(c6430.28,6761.14) U2.2@6395.9,6737.11 ; U2.2@6375,6715 6375,6760 6455.91,6840.91 6455.91,6870.08 ; 6417.94,6813.54 cw(c6484.56,6795.69) 6456.52,6858.71 ; 6434,6818 cw(c6470.72,6796.8) 6459.75,6837.76 ; U2.2@6376.5,6722.5 cw(c6470.65,6722.5) 6404.08,6789.08 ccw(c6470.65,6722.5) U2.2@6376.5,6722.5 ; 6398.82,6783.82 ccw(c6322.56,6860.08) 6430.41,6860.08 cw(c6322.56,6860.08) 6398.82,6783.82 ; U2.2@6400.5,6722.5 cw(c6552.6,6722.5) 6445.05,6830.05 ccw(c6552.6,6722.5) U2.2@6400.5,6722.5 ; 6423.21,6792.23 ccw(c6353.3,6832.59) 6431.27,6853.48 cw(c6353.3,6832.59) 6423.21,6792.23 ; 6436.76,6815.69 cw(c6473.48,6794.49) 6462.51,6835.45 ccw(c6473.48,6794.49) 6436.76,6815.69 ; 6439.79,6824.79 ccw(c6404.5,6860.08) 6454.41,6860.08 cw(c6404.5,6860.08) 6439.79,6824.79
EB-R_: "P3 ANALOG.4" U2.4 | length 1215.5
  Bottom Layer w24: U2.4@6167.1,6746.75 ccw(c6156.65,6778.84) 6189.26,6770.11 ccw(c6225.79,6760.32) U2.4@6195.45,6737.73 ; U2.4@6174.25,6723.8 ccw(c6130.39,6799.76) 6215.12,6777.06 ; U2.4@6175,6715 6175,6758.43 6255.91,6839.34 6255.91,6870.08 ; 6217.67,6812.56 cw(c6286.38,6794.15) 6256.54,6858.72 ; U2.4@6176.5,6722.5 cw(c6266.87,6722.5) 6202.97,6786.4 ccw(c6266.87,6722.5) U2.4@6176.5,6722.5 ; 6197.71,6781.14 ccw(c6118.77,6860.08) 6230.41,6860.08 cw(c6118.77,6860.08) 6197.71,6781.14 ; U2.4@6200.5,6722.5 cw(c6348.81,6722.5) 6243.94,6827.37 ccw(c6348.81,6722.5) U2.4@6200.5,6722.5 ; 6223.08,6791.25 ccw(c6152.06,6832.25) 6231.27,6853.48 cw(c6152.06,6832.25) 6223.08,6791.25 ; 6237.54,6816.29 cw(c6273.15,6795.74) 6262.51,6835.45 ccw(c6273.15,6795.74) 6237.54,6816.29 ; 6238.68,6822.11 ccw(c6200.71,6860.08) 6254.41,6860.08 cw(c6200.71,6860.08) 6238.68,6822.11
EB-Y_: "P3 ANALOG.5" U2.3 | length 1219.5
  Bottom Layer w24: U2.3@6266.33,6746.48 ccw(c6253.6,6781.69) 6289.76,6772 ccw(c6330.28,6761.14) U2.3@6295.9,6737.11 ; U2.3@6274.25,6723.8 ccw(c6230.39,6799.76) 6315.12,6777.06 ; U2.3@6275,6715 6275,6760 6355.91,6840.91 6355.91,6870.08 ; 6317.94,6813.54 cw(c6384.56,6795.69) 6356.52,6858.71 ; U2.3@6276.5,6722.5 cw(c6370.65,6722.5) 6304.08,6789.08 ccw(c6370.65,6722.5) U2.3@6276.5,6722.5 ; 6298.82,6783.82 ccw(c6222.56,6860.08) 6330.41,6860.08 cw(c6222.56,6860.08) 6298.82,6783.82 ; U2.3@6300.5,6722.5 cw(c6452.6,6722.5) 6345.05,6830.05 ccw(c6452.6,6722.5) U2.3@6300.5,6722.5 ; 6323.21,6792.23 ccw(c6253.3,6832.59) 6331.27,6853.48 cw(c6253.3,6832.59) 6323.21,6792.23 ; 6336.76,6815.69 cw(c6373.48,6794.49) 6362.51,6835.45 ccw(c6373.48,6794.49) 6336.76,6815.69 ; 6339.79,6824.79 ccw(c6304.5,6860.08) 6354.41,6860.08 cw(c6304.5,6860.08) 6339.79,6824.79
EMSTP: C18.2 R17.2 U2.20 | length 1739.3
  Top Layer w30: C18.2@5211.02,6095 R17.2@5211.02,6224.43 5397.6,6411 5924,6411 6075,6260 U2.20@6075,6115 ; 5211.02,6134.01 ccw(c5246.1,6134.01) 5221.3,6109.21 cw(c5246.1,6134.01) 5211.02,6134.01 ; 5211.02,6134.01 cw(c5175.95,6134.01) 5200.75,6109.21 ccw(c5175.95,6134.01) 5211.02,6134.01 ; 5211.02,6185.42 ccw(c5175.95,6185.42) 5200.75,6210.22 cw(c5175.95,6185.42) 5211.02,6185.42 ; 5211.02,6185.42 cw(c5246.1,6185.42) 5221.3,6210.22 ccw(c5246.1,6185.42) 5211.02,6185.42 ; 6075,6176.82 ccw(c6129.32,6176.82) 6090.91,6138.41 cw(c6129.32,6176.82) 6075,6176.82 ; 6075,6176.82 cw(c6020.68,6176.82) 6059.09,6138.41 ccw(c6020.68,6176.82) 6075,6176.82 ; R17.2@5211.02,6242.89 ccw(c5211.02,6287.47) 5242.54,6255.95 cw(c5211.02,6287.47) R17.2@5211.02,6242.89
EMSTPIN: D11.2 P1PANEL.6 | length 2290
  Top Layer w22: v1@4767.1,6040.6 cw(c4797.25,6034.43) 4789.29,6064.16 ; v1(4770.04,6040) D11.2@4825.04,6095 ; v1@4770.64,6037.06 ccw(c4764.47,6067.21) 4794.2,6059.25 ; v1@4772.54,6058.83 ccw(c4777.25,6094.3) D11.2@4808.24,6076.41 ; v1@4775.45,6058.21 ccw(c4784.38,6088.32) D11.2@4806.59,6066.11 ; v1@4777.78,6058.18 ccw(c4752.69,6101.65) D11.2@4802.67,6097.06 ; v1@4783.32,6064.84 cw(c4808.08,6040.08) D11.2@4818.41,6073.54 ; v1@4788.22,6047.74 cw(c4831.69,6022.65) D11.2@4827.1,6072.63 ; v1@4788.25,6045.41 cw(c4818.36,6054.34) D11.2@4796.15,6076.55 ; v1@4788.87,6042.5 cw(c4824.34,6047.21) D11.2@4806.45,6078.2 ; D11.2@4794.87,6076.39 ccw(c4776.26,6095) D11.2@4802.58,6095 ; v1@4794.88,6053.28 ccw(c4770.12,6078.04) D11.2@4803.58,6088.37 ; D11.2@4799.47,6070.7 cw(c4812.49,6048.15) D11.2@4819.23,6073.3 ; D11.2@4800.74,6069.43 ccw(c4778.19,6082.45) D11.2@4803.34,6089.19 ; D11.2@4806.43,6064.83 cw(c4825.04,6046.22) D11.2@4825.04,6072.54 ; v1@4766.6,6058.69 ccw(c4757.13,6110.19) D11.2@4802.49,6084.01 ; v1@4766.6,6058.69 ccw(c4757.13,6110.19) D11.2@4802.49,6084.01 ; v1@4766.6,6058.69 ccw(c4757.13,6110.19) D11.2@4802.49,6084.01 ; v1@4774.96,6058.35 ccw(c4781.44,6082.56) 4793.97,6060.86 ; v1@4774.96,6058.35 ccw(c4781.44,6082.56) 4793.97,6060.86 ; v1@4774.96,6058.35 ccw(c4781.44,6082.56) 4793.97,6060.86 ; v1@4786.69,6056.65 ccw(c4748.34,6095) D11.2@4802.58,6095 ; v1@4786.69,6056.65 cw(c4825.04,6018.3) D11.2@4825.04,6072.54 ; v1@4786.69,6056.65 ccw(c4748.34,6095) D11.2@4802.58,6095 ; v1@4786.69,6056.65 cw(c4825.04,6018.3) D11.2@4825.04,6072.54 ; v1@4788.39,6044.92 cw(c4812.6,6051.4) 4790.9,6063.93 ; v1@4788.39,6044.92 cw(c4812.6,6051.4) 4790.9,6063.93 ; v1@4788.39,6044.92 cw(c4812.6,6051.4) 4790.9,6063.93 ; v1@4788.73,6036.56 cw(c4840.23,6027.09) D11.2@4814.05,6072.45 ; v1@4788.73,6036.56 cw(c4840.23,6027.09) D11.2@4814.05,6072.45 ; v1@4788.73,6036.56 cw(c4840.23,6027.09) D11.2@4814.05,6072.45 ; D11.2@4802.48,6072.44 ccw(c4834.91,6040) 4789.04,6040 cw(c4834.91,6040) D11.2@4802.48,6072.44 ; D11.2@4802.48,6072.44 cw(c4770.04,6104.87) 4770.04,6059 ccw(c4770.04,6104.87) D11.2@4802.48,6072.44
  Bottom Layer w22: P1PANEL.6@4153.54,5866.14 4296.14,5866.14 4470,6040 v1(4770.04,6040) ; 4227.52,5866.14 ccw(c4227.52,5802.17) 4182.28,5847.4 cw(c4227.52,5802.17) 4227.52,5866.14 ; 4227.52,5866.14 cw(c4227.52,5930.12) 4182.28,5884.88 ccw(c4227.52,5930.12) 4227.52,5866.14 ; 4724.17,6040 ccw(c4724.17,6085.87) 4756.6,6053.44 cw(c4724.17,6085.87) 4724.17,6040 ; 4724.17,6040 cw(c4724.17,5994.13) 4756.6,6026.56 ccw(c4724.17,5994.13) 4724.17,6040
FAULTIND: MC1.27 P4KB.7 | length 1221.6
  Bottom Layer w16: MC1.27@7360,5080 7455,5080 7580,5205 7580,5729.61 ; 7596.2,5745.8 cw(c7624.79,5717.21) P4KB.7@7641.8,5753.89 ; P4KB.7@7635.07,5739.38 ccw(c7614.53,5695.08) 7580,5729.61 ; P4KB.7@7657.48,5766.14 7616.53,5766.14 7580,5729.61 ; 7438.72,5080 ccw(c7438.72,5008.78) 7388.36,5059.14 cw(c7438.72,5008.78) 7438.72,5080 ; 7438.72,5080 cw(c7438.72,5151.22) 7388.36,5100.86 ccw(c7438.72,5151.22) 7438.72,5080
FLDIR: C57.1 R53.1 U2.16 | length 2374
  Top Layer w18: R53.1@4813.98,5635 4813.98,5700 C57.1@4813.98,5740 ; 4813.98,5688.49 ccw(c4863.53,5688.49) 4828.49,5653.45 cw(c4863.53,5688.49) 4813.98,5688.49 ; 4813.98,5688.49 cw(c4764.42,5688.49) 4799.46,5653.45 ccw(c4764.42,5688.49) 4813.98,5688.49 ; 4813.98,5706.51 ccw(c4764.42,5706.51) 4799.46,5741.55 cw(c4764.42,5706.51) 4813.98,5706.51 ; 4813.98,5706.51 cw(c4863.53,5706.51) 4828.49,5741.55 ccw(c4863.53,5706.51) 4813.98,5706.51
  Top Layer w20: 4813.98,5700 5025,5700 v1(5040,5685) ; 4990.91,5691.03 ccw(c5003.92,5713.56) v1@5024.32,5697.41 ; v1(5040,5685) ccw(c5003.79,5648.79) 5003.79,5700 cw(c5003.79,5648.79) v1(5040,5685) ; 4955.5,5700 cw(c4955.5,5600.5) 5025.86,5670.86 ccw(c4955.5,5600.5) 4955.5,5700
  Bottom Layer w20: v1(5040,5685) 5150,5685 5300,5835 5300,6170 5350,6220 5635,6220 5675,6180 ; U2.16@5675,6115 5675,6180 ; 5088.28,5685 ccw(c5088.28,5636.72) 5054.14,5670.86 cw(c5088.28,5636.72) 5088.28,5685 ; 5088.28,5685 cw(c5088.28,5733.28) 5054.14,5699.14 ccw(c5088.28,5733.28) 5088.28,5685 ; 5675,6180 ccw(c5721.36,6180) 5692.26,6143.91 cw(c5721.36,6180) 5675,6180 ; 5675,6180 cw(c5628.64,6180) 5657.74,6143.91 ccw(c5628.64,6180) 5675,6180
FLDIRIN: P1PANEL.5 R5.2 R24.1 | length 2111.5
  Top Layer w18: v1(4560,5380) 4560,5451.02 R5.2@4563.98,5455 4563.98,5488.98 4600,5525 4719,5525 4789,5455 R24.1@4813.98,5455
  Bottom Layer w18: P1PANEL.5@4153.54,5966.14 4157.4,5970 4305,5970 4425,6090 4735.14,6090 4750.14,6105 4830,6105 4860,6075 4860,5990 4825,5955 4635,5955 4560,5880 v1(4560,5380)
FLG: C15.1 R119.2 U2.18 | length 2789.5
  Top Layer w24: C15.1@5411.02,5005 R119.2@5411.02,5100 v1(5635,5100) ; U2.18@5875,6115 5875,6010 6030,5855 v1(6030,5765) ; 5411.02,5051.25 ccw(c5453.34,5051.25) 5423.42,5021.33 cw(c5453.34,5051.25) 5411.02,5051.25 ; 5411.02,5051.25 cw(c5368.71,5051.25) 5398.63,5021.33 ccw(c5368.71,5051.25) 5411.02,5051.25 ; 5411.02,5053.75 ccw(c5368.71,5053.75) 5398.63,5083.67 cw(c5368.71,5053.75) 5411.02,5053.75 ; 5411.02,5053.75 cw(c5453.34,5053.75) 5423.42,5083.67 ccw(c5453.34,5053.75) 5411.02,5053.75 ; 5453.34,5100 ccw(c5453.34,5057.68) 5423.42,5087.61 cw(c5453.34,5057.68) 5453.34,5100 ; 5453.34,5100 cw(c5453.34,5142.32) 5423.42,5112.39 ccw(c5453.34,5142.32) 5453.34,5100 ; 5591.54,5100 ccw(c5591.54,5143.46) 5622.27,5112.73 cw(c5591.54,5143.46) 5591.54,5100 ; 5591.54,5100 cw(c5591.54,5056.54) 5622.27,5087.27 ccw(c5591.54,5056.54) 5591.54,5100 ; 5875,6045.94 ccw(c5813.44,6045.94) 5856.97,6089.47 cw(c5813.44,6045.94) 5875,6045.94 ; 5875,6045.94 cw(c5936.56,6045.94) 5893.03,6089.47 ccw(c5936.56,6045.94) 5875,6045.94 ; 6030,5808.46 ccw(c6073.46,5808.46) 6042.73,5777.73 cw(c6073.46,5808.46) 6030,5808.46 ; 6030,5808.46 cw(c5986.54,5808.46) 6017.27,5777.73 ccw(c5986.54,5808.46) 6030,5808.46
  Bottom Layer w24: v1(5635,5100) 5700,5165 5700,5587.67 5842.33,5730 5995,5730 v1(6030,5765) ; 5665.73,5130.73 ccw(c5696.46,5100) 5653,5100 cw(c5696.46,5100) 5665.73,5130.73 ; 5665.73,5130.73 cw(c5635,5161.46) 5635,5118 ccw(c5635,5161.46) 5665.73,5130.73 ; 5999.27,5734.27 ccw(c5968.54,5765) 6012,5765 cw(c5968.54,5765) 5999.27,5734.27 ; 5999.27,5734.27 cw(c6030,5703.54) 6030,5747 ccw(c6030,5703.54) 5999.27,5734.27
FLGIN: P1PANEL.11 R21.2 | length 2998.4
  Top Layer w24: v1(5590,5275) 5590,5362.95 5801.02,5573.98 R21.2@5801.02,5685 ; 5590,5318.46 ccw(c5633.46,5318.46) 5602.73,5287.73 cw(c5633.46,5318.46) 5590,5318.46 ; 5590,5318.46 cw(c5546.54,5318.46) 5577.27,5287.73 ccw(c5546.54,5318.46) 5590,5318.46 ; 5801.02,5638.75 ccw(c5758.71,5638.75) 5788.63,5668.67 cw(c5758.71,5638.75) 5801.02,5638.75 ; 5801.02,5638.75 cw(c5843.34,5638.75) 5813.42,5668.67 ccw(c5843.34,5638.75) 5801.02,5638.75
  Bottom Layer w24: P1PANEL.11@4153.54,5366.14 4203.86,5366.14 ; P1PANEL.11@4164.81,5366.95 ccw(c4238.59,5414.4) 4219.96,5328.68 ; P1PANEL.11@4179.57,5346.31 cw(c4204.03,5316.02) 4212.3,5354.07 cw(c4219.68,5388.02) P1PANEL.11@4187.3,5375.4 ; 4260,5310 4270,5300 ; v1(5590,5275) 4295,5275 4270,5300 ; 4203.86,5366.14 ccw(c4203.86,5347.03) 4186.59,5355.22 cw(c4203.86,5347.03) 4203.86,5366.14 ; 4203.86,5366.14 cw(c4203.86,5385.26) 4186.59,5377.07 ccw(c4203.86,5385.26) 4203.86,5366.14 ; 4203.86,5366.14 4270,5300 ; 4270,5300 ccw(c4171.43,5201.44) 4164.76,5340.67 cw(c4171.43,5201.44) 4270,5300 ; 5546.54,5275 ccw(c5546.54,5318.46) 5577.27,5287.73 cw(c5546.54,5318.46) 5546.54,5275 ; 5546.54,5275 cw(c5546.54,5231.54) 5577.27,5262.27 ccw(c5546.54,5231.54) 5546.54,5275 ; P1PANEL.11@4163.62,5364.64 cw(c4167.93,5274.63) 4231.65,5338.35 ccw(c4167.93,5274.63) P1PANEL.11@4163.62,5364.64
FLSTART: "P2 RELAYS.3" MC1.6 R2.1 | length 3949.4
  Top Layer w22: R2.1@6636.02,5875 6641.02,5880 MC1.6@6760,5880 6830,5880 ; v3(6874,4658) 7041,4658 7145,4762 7145,5364 6901,5608 6901,5809 6830,5880 ; 6688.52,5880 ccw(c6688.52,5943.98) 6733.76,5898.74 cw(c6688.52,5943.98) 6688.52,5880 ; 6688.52,5880 cw(c6688.52,5816.02) 6733.76,5861.26 ccw(c6688.52,5816.02) 6688.52,5880 ; 6830,5880 ccw(c6830,5819.55) 6786.55,5861.58 cw(c6830,5819.55) 6830,5880 ; 6830,5880 cw(c6830,5940.45) 6786.55,5898.42 ccw(c6830,5940.45) 6830,5880 ; 6937.98,4658 ccw(c6937.98,4594.02) 6892.74,4639.26 cw(c6937.98,4594.02) 6937.98,4658 ; 6937.98,4658 cw(c6937.98,4721.98) 6892.74,4676.74 ccw(c6937.98,4721.98) 6937.98,4658 ; R2.1@6649.12,5865.84 cw(c6683.32,5831.64) 6683.32,5880 ccw(c6683.32,5831.64) R2.1@6649.12,5865.84 ; R2.1@6649.12,5892.04 ccw(c6678.19,5921.1) 6678.19,5880 cw(c6678.19,5921.1) R2.1@6649.12,5892.04
  Bottom Layer w22: 6847.24,4153.54 6847.24,4320.24 6903,4376 6903,4629 v3(6874,4658) ; v3@6867.14,4632.4 cw(c6854.42,4584.94) 6896.98,4609.51 ; 6873.91,4606.95 cw(c6911.11,4628.43) v3@6877.52,4655.2 ; 6890.06,4579 cw(c6938.24,4606.82) v3@6894.73,4641.49 ; v3@6897.38,4645.52 ccw(c6931.69,4627.19) 6898,4607.74 ; 6847.24,4227.52 ccw(c6911.22,4227.52) 6865.98,4182.28 cw(c6911.22,4227.52) 6847.24,4227.52 ; 6847.24,4227.52 cw(c6783.27,4227.52) 6828.51,4182.28 ccw(c6783.27,4227.52) 6847.24,4227.52 ; v3@6855.26,4639.26 cw(c6740.01,4524.01) 6903,4524.01 ccw(c6740.01,4524.01) v3@6855.26,4639.26 ; v3@6870.82,4654.82 cw(c6793.12,4577.12) 6903,4577.12 ccw(c6793.12,4577.12) v3@6870.82,4654.82 ; v3@6886.37,4670.37 cw(c6846.24,4630.24) 6903,4630.24 ccw(c6846.24,4630.24) v3@6886.37,4670.37
FLT1: C16.2 R9.2 U2.8 | length 2080.6
  Top Layer w22: C16.2@4686.02,6618.61 R9.2@4686.02,6750 4686.02,6826.02 4762,6902 5678,6902 5775,6805 U2.8@5775,6715 ; 4686.02,6667.27 ccw(c4730.75,6667.27) 4699.12,6635.64 cw(c4730.75,6667.27) 4686.02,6667.27 ; 4686.02,6667.27 cw(c4641.29,6667.27) 4672.92,6635.64 ccw(c4641.29,6667.27) 4686.02,6667.27 ; 4686.02,6701.33 ccw(c4641.29,6701.33) 4672.92,6732.96 cw(c4641.29,6701.33) 4686.02,6701.33 ; 4686.02,6701.33 cw(c4730.75,6701.33) 4699.12,6732.96 ccw(c4730.75,6701.33) 4686.02,6701.33 ; 4686.02,6798.67 ccw(c4730.75,6798.67) 4699.12,6767.04 cw(c4730.75,6798.67) 4686.02,6798.67 ; 4686.02,6798.67 cw(c4641.29,6798.67) 4672.92,6767.04 ccw(c4641.29,6798.67) 4686.02,6798.67 ; 5775,6786.48 ccw(c5838.98,6786.48) 5793.74,6741.24 cw(c5838.98,6786.48) 5775,6786.48 ; 5775,6786.48 cw(c5711.02,6786.48) 5756.26,6741.24 ccw(c5711.02,6786.48) 5775,6786.48
FLT1IN: D64.2 P1PANEL.1 | length 674.5
  Top Layer w30: P1PANEL.1@4153.54,6366.14 4153.54,6558.54 4213.61,6618.61 D64.2@4300.04,6618.61 ; 4153.54,6420.46 ccw(c4207.86,6420.46) 4169.45,6382.05 cw(c4207.86,6420.46) 4153.54,6420.46 ; 4153.54,6420.46 cw(c4099.22,6420.46) 4137.63,6382.05 ccw(c4099.22,6420.46) 4153.54,6420.46 ; 4255.46,6618.61 ccw(c4255.46,6663.18) 4286.98,6631.66 cw(c4255.46,6663.18) 4255.46,6618.61 ; 4255.46,6618.61 cw(c4255.46,6574.03) 4286.98,6605.55 ccw(c4255.46,6574.03) 4255.46,6618.61
FREQ: "P3 ANALOG.7" MC1.16 | length 3202
  Top Layer w20: MC1.16@6760,4880 6834,4880 6920,4966 6920,5382 v3(6860,5442) ; 6833.89,4880 ccw(c6833.89,4813.61) 6786.95,4860.55 cw(c6833.89,4813.61) 6833.89,4880 ; 6833.89,4880 cw(c6833.89,4946.39) 6786.95,4899.45 ccw(c6833.89,4946.39) 6833.89,4880 ; 6906.95,5395.05 ccw(c6860,5348.11) 6860,5414.5 cw(c6860,5348.11) 6906.95,5395.05 ; 6906.95,5395.05 cw(c6953.89,5442) 6887.5,5442 ccw(c6953.89,5442) 6906.95,5395.05
  Bottom Layer w20: 6555.91,6870.08 6555.91,6534.09 6595,6495 6790,6495 6855,6430 6855,5442 v3(6860,5442) ; 6555.91,6793.69 ccw(c6489.52,6793.69) 6536.46,6840.63 cw(c6489.52,6793.69) 6555.91,6793.69 ; 6555.91,6793.69 cw(c6622.3,6793.69) 6575.35,6840.63 ccw(c6622.3,6793.69) 6555.91,6793.69 ; v3@6840.55,5461.45 ccw(c6805.68,5496.32) 6855,5496.32 cw(c6805.68,5496.32) v3@6840.55,5461.45 ; 6855,5520.46 ccw(c6938.46,5520.46) 6879.45,5461.45 cw(c6938.46,5520.46) 6855,5520.46
GCONTACT: "P2 RELAYS.8" MC1.21 P4KB.16 | length 1651.2
  Bottom Layer w20: 7347.24,4153.54 7347.24,4467.24 MC1.21@7360,4480 7472.13,4480 7553,4560.87 7553,4828 7591.14,4866.14 ; P4KB.16@7625.8,4849.22 ccw(c7591.14,4822.19) 7591.14,4866.14 ; P4KB.16@7625.8,4883.06 cw(c7591.14,4910.1) 7591.14,4866.14 ; P4KB.16@7657.48,4866.14 7591.14,4866.14 ; 7347.24,4229.93 ccw(c7413.63,4229.93) 7366.69,4182.99 cw(c7413.63,4229.93) 7347.24,4229.93 ; 7347.24,4229.93 cw(c7280.85,4229.93) 7327.8,4182.99 ccw(c7280.85,4229.93) 7347.24,4229.93 ; 7433.89,4480 ccw(c7433.89,4413.61) 7386.95,4460.55 cw(c7433.89,4413.61) 7433.89,4480 ; 7433.89,4480 cw(c7433.89,4546.39) 7386.95,4499.45 ccw(c7433.89,4546.39) 7433.89,4480 ; MC1.21@7333.05,4460.55 cw(c7298.8,4426.3) 7347.24,4426.3 ccw(c7298.8,4426.3) MC1.21@7333.05,4460.55 ; 7347.24,4400.92 cw(c7431.58,4400.92) 7371.95,4460.55 ccw(c7431.58,4400.92) 7347.24,4400.92